# EAGLE board final (EAGLE 8.5.0), part 1 of 3
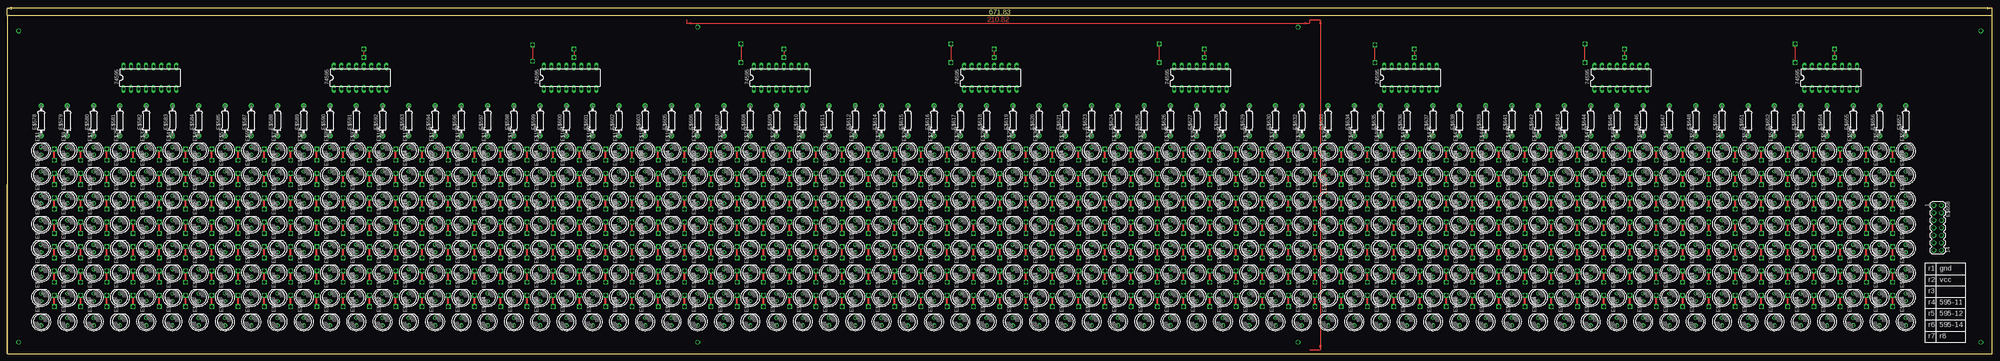
[diagram p0: board, top side]
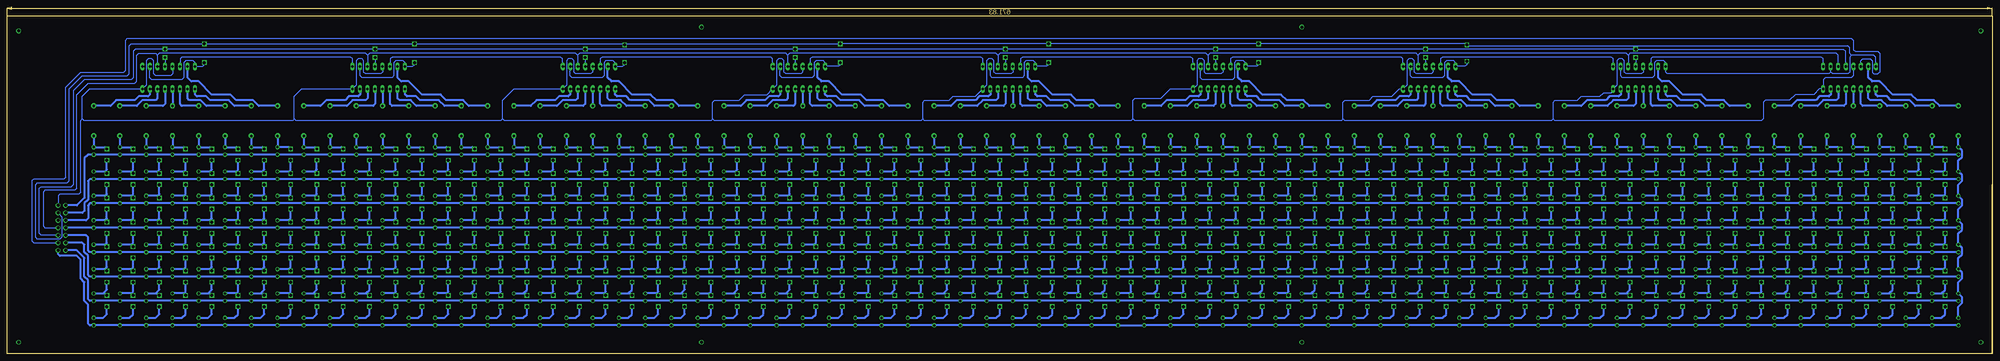
[diagram p1: board, bottom side, seen from below]

Size 671.83 x 114.3 mm. Coordinates in mm from the lower left corner, seen from the top.
Outline: 0,114.3 0,0 671.83,0 671.83,114.3 0,114.3
Copper layers (1*16): Top 0.035mm / dielectric 1.5mm / Bottom 0.035mm
Design rules "default": minimum track width 6mil, minimum drill 0.35mm, track to track 6mil, track to pad 6mil, pad to pad 6mil, via to via 6mil, smd to smd 6mil, copper to edge 40mil, drill to drill 6mil, minimum pad ring 10mil, minimum via ring 8mil, stop-mask expansion 4mil, vias tented up to drill 0mil, thermal gap 10mil

## Footprints (pad centres in the part's own frame; a part is rotated, then mirrored left to right if it is on the bottom)
LED5MM = drill 0.813 octagon: A -1.27,0; K 1.27,0
DIL16 = drill 0.813 long: !OE 3.81,1.27; !SRCLR 3.81,-6.35; A 3.81,6.35; B -3.81,8.89; C -3.81,6.35; D -3.81,3.81; E -3.81,1.27; F -3.81,-1.27; G -3.81,-3.81; GND -3.81,-8.89; H -3.81,-6.35; H' 3.81,-8.89; RCLK 3.81,-1.27; SER 3.81,3.81; SRCLK 3.81,-3.81; VCC 3.81,8.89
0207/10 = drill 0.813 pad 1.676 octagon: 1 -5.08,0; 2 5.08,0
MA07-2 = drill 1.016 octagon: 1 -7.62,-1.27; 2 -7.62,1.27; 3 -5.08,-1.27; 4 -5.08,1.27; 5 -2.54,-1.27; 6 -2.54,1.27; 7 0,-1.27; 8 0,1.27; 9 2.54,-1.27; 10 2.54,1.27; 11 5.08,-1.27; 12 5.08,1.27; 13 7.62,-1.27; 14 7.62,1.27

## Placement (x,y rotation side)
E$1  [LED5MM]  11.43,68.58 90 top
E$2  [LED5MM]  11.43,60.33 90 top
E$3  [LED5MM]  11.43,52.07 90 top
E$4  [LED5MM]  11.43,43.82 90 top
E$5  [LED5MM]  11.43,35.56 90 top
E$6  [LED5MM]  11.43,27.3 90 top
E$7  [LED5MM]  11.43,19.05 90 top
E$8  [LED5MM]  11.43,10.79 90 top
E$9  [LED5MM]  20.32,68.58 90 top
E$10  [LED5MM]  20.32,60.33 90 top
E$11  [LED5MM]  20.32,52.07 90 top
E$12  [LED5MM]  20.32,43.82 90 top
E$13  [LED5MM]  20.32,35.56 90 top
E$14  [LED5MM]  20.32,27.3 90 top
E$15  [LED5MM]  20.32,19.05 90 top
E$16  [LED5MM]  20.32,10.79 90 top
E$17  [LED5MM]  29.21,68.58 90 top
E$18  [LED5MM]  29.21,60.33 90 top
E$19  [LED5MM]  29.21,52.07 90 top
E$20  [LED5MM]  29.21,43.82 90 top
E$21  [LED5MM]  29.21,35.56 90 top
E$22  [LED5MM]  29.21,27.3 90 top
E$23  [LED5MM]  29.21,19.05 90 top
E$24  [LED5MM]  29.21,10.79 90 top
E$25  [LED5MM]  38.1,68.58 90 top
E$26  [LED5MM]  38.1,60.33 90 top
E$27  [LED5MM]  38.1,52.07 90 top
E$28  [LED5MM]  38.1,43.82 90 top
E$29  [LED5MM]  38.1,35.56 90 top
E$30  [LED5MM]  38.1,27.3 90 top
E$31  [LED5MM]  38.1,19.05 90 top
E$32  [LED5MM]  38.1,10.79 90 top
E$33  [LED5MM]  46.99,68.58 90 top
E$34  [LED5MM]  46.99,60.33 90 top
E$35  [LED5MM]  46.99,52.07 90 top
E$36  [LED5MM]  46.99,43.82 90 top
E$37  [LED5MM]  46.99,35.56 90 top
E$38  [LED5MM]  46.99,27.3 90 top
E$39  [LED5MM]  46.99,19.05 90 top
E$40  [LED5MM]  46.99,10.79 90 top
E$41  [LED5MM]  55.88,68.58 90 top
E$42  [LED5MM]  55.88,60.33 90 top
E$43  [LED5MM]  55.88,52.07 90 top
E$44  [LED5MM]  55.88,43.82 90 top
E$45  [LED5MM]  55.88,35.56 90 top
E$46  [LED5MM]  55.88,27.3 90 top
E$47  [LED5MM]  55.88,19.05 90 top
E$48  [LED5MM]  55.88,10.79 90 top
E$49  [LED5MM]  64.77,68.58 90 top
E$50  [LED5MM]  64.77,60.33 90 top
E$51  [LED5MM]  64.77,52.07 90 top
E$52  [LED5MM]  64.77,43.82 90 top
E$53  [LED5MM]  64.77,35.56 90 top
E$54  [LED5MM]  64.77,27.3 90 top
E$55  [LED5MM]  64.77,19.05 90 top
E$56  [LED5MM]  64.77,10.79 90 top
E$57  [LED5MM]  73.66,68.58 90 top
E$58  [LED5MM]  73.66,60.33 90 top
E$59  [LED5MM]  73.66,52.07 90 top
E$60  [LED5MM]  73.66,43.82 90 top
E$61  [LED5MM]  73.66,35.56 90 top
E$62  [LED5MM]  73.66,27.3 90 top
E$63  [LED5MM]  73.66,19.05 90 top
E$64  [LED5MM]  73.66,10.79 90 top
E$65  [LED5MM]  82.55,68.58 90 top
E$66  [LED5MM]  82.55,60.33 90 top
E$67  [LED5MM]  82.55,52.07 90 top
E$68  [LED5MM]  82.55,43.82 90 top
E$69  [LED5MM]  82.55,35.56 90 top
E$70  [LED5MM]  82.55,27.3 90 top
E$71  [LED5MM]  82.55,19.05 90 top
E$72  [LED5MM]  82.55,10.79 90 top
E$73  [LED5MM]  91.44,68.58 90 top
E$74  [LED5MM]  91.44,60.33 90 top
E$75  [LED5MM]  91.44,52.07 90 top
E$76  [LED5MM]  91.44,43.82 90 top
E$77  [LED5MM]  91.44,35.56 90 top
E$78  [LED5MM]  91.44,27.3 90 top
E$79  [LED5MM]  91.44,19.05 90 top
E$80  [LED5MM]  91.44,10.79 90 top
E$81  [LED5MM]  100.33,68.58 90 top
E$82  [LED5MM]  100.33,60.33 90 top
E$83  [LED5MM]  100.33,52.07 90 top
E$84  [LED5MM]  100.33,43.82 90 top
E$85  [LED5MM]  100.33,35.56 90 top
E$86  [LED5MM]  100.33,27.3 90 top
E$87  [LED5MM]  100.33,19.05 90 top
E$88  [LED5MM]  100.33,10.79 90 top
E$89  [LED5MM]  109.22,68.58 90 top
E$90  [LED5MM]  109.22,60.33 90 top
E$91  [LED5MM]  109.22,52.07 90 top
E$92  [LED5MM]  109.22,43.82 90 top
E$93  [LED5MM]  109.22,35.56 90 top
E$94  [LED5MM]  109.22,27.3 90 top
E$95  [LED5MM]  109.22,19.05 90 top
E$96  [LED5MM]  109.22,10.79 90 top
E$97  [LED5MM]  118.11,68.58 90 top
E$98  [LED5MM]  118.11,60.33 90 top
E$99  [LED5MM]  118.11,52.07 90 top
E$100  [LED5MM]  118.11,43.82 90 top
E$101  [LED5MM]  118.11,35.56 90 top
E$102  [LED5MM]  118.11,27.3 90 top
E$103  [LED5MM]  118.11,19.05 90 top
E$104  [LED5MM]  118.11,10.79 90 top
E$105  [LED5MM]  127,68.58 90 top
E$106  [LED5MM]  127,60.33 90 top
E$107  [LED5MM]  127,52.07 90 top
E$108  [LED5MM]  127,43.82 90 top
E$109  [LED5MM]  127,35.56 90 top
E$110  [LED5MM]  127,27.3 90 top
E$111  [LED5MM]  127,19.05 90 top
E$112  [LED5MM]  127,10.79 90 top
E$113  [LED5MM]  135.89,68.58 90 top
E$114  [LED5MM]  135.89,60.33 90 top
E$115  [LED5MM]  135.89,52.07 90 top
E$116  [LED5MM]  135.89,43.82 90 top
E$117  [LED5MM]  135.89,35.56 90 top
E$118  [LED5MM]  135.89,27.3 90 top
E$119  [LED5MM]  135.89,19.05 90 top
E$120  [LED5MM]  135.89,10.79 90 top
E$121  [LED5MM]  144.78,68.58 90 top
E$122  [LED5MM]  144.78,60.33 90 top
E$123  [LED5MM]  144.78,52.07 90 top
E$124  [LED5MM]  144.78,43.82 90 top
E$125  [LED5MM]  144.78,35.56 90 top
E$126  [LED5MM]  144.78,27.3 90 top
E$127  [LED5MM]  144.78,19.05 90 top
E$128  [LED5MM]  144.78,10.79 90 top
E$129  [LED5MM]  153.67,68.58 90 top
E$130  [LED5MM]  153.67,60.33 90 top
E$131  [LED5MM]  153.67,52.07 90 top
E$132  [LED5MM]  153.67,43.82 90 top
E$133  [LED5MM]  153.67,35.56 90 top
E$134  [LED5MM]  153.67,27.3 90 top
E$135  [LED5MM]  153.67,19.05 90 top
E$136  [LED5MM]  153.67,10.79 90 top
E$137  [LED5MM]  162.56,68.58 90 top
E$138  [LED5MM]  162.56,60.33 90 top
E$139  [LED5MM]  162.56,52.07 90 top
E$140  [LED5MM]  162.56,43.82 90 top
E$141  [LED5MM]  162.56,35.56 90 top
E$142  [LED5MM]  162.56,27.3 90 top
E$143  [LED5MM]  162.56,19.05 90 top
E$144  [LED5MM]  162.56,10.79 90 top
E$145  [LED5MM]  171.45,68.58 90 top
E$146  [LED5MM]  171.45,60.33 90 top
E$147  [LED5MM]  171.45,52.07 90 top
E$148  [LED5MM]  171.45,43.82 90 top
E$149  [LED5MM]  171.45,35.56 90 top
E$150  [LED5MM]  171.45,27.3 90 top
E$151  [LED5MM]  171.45,19.05 90 top
E$152  [LED5MM]  171.45,10.79 90 top
E$153  [LED5MM]  180.34,68.58 90 top
E$154  [LED5MM]  180.34,60.33 90 top
E$155  [LED5MM]  180.34,52.07 90 top
E$156  [LED5MM]  180.34,43.82 90 top
E$157  [LED5MM]  180.34,35.56 90 top
E$158  [LED5MM]  180.34,27.3 90 top
E$159  [LED5MM]  180.34,19.05 90 top
E$160  [LED5MM]  180.34,10.79 90 top
E$161  [LED5MM]  189.23,68.58 90 top
E$162  [LED5MM]  189.23,60.33 90 top
E$163  [LED5MM]  189.23,52.07 90 top
E$164  [LED5MM]  189.23,43.82 90 top
E$165  [LED5MM]  189.23,35.56 90 top
E$166  [LED5MM]  189.23,27.3 90 top
E$167  [LED5MM]  189.23,19.05 90 top
E$168  [LED5MM]  189.23,10.79 90 top
E$169  [LED5MM]  198.12,68.58 90 top
E$170  [LED5MM]  198.12,60.33 90 top
E$171  [LED5MM]  198.12,52.07 90 top
E$172  [LED5MM]  198.12,43.82 90 top
E$173  [LED5MM]  198.12,35.56 90 top
E$174  [LED5MM]  198.12,27.3 90 top
E$175  [LED5MM]  198.12,19.05 90 top
E$176  [LED5MM]  198.12,10.79 90 top
E$177  [LED5MM]  207.01,68.58 90 top
E$178  [LED5MM]  207.01,60.33 90 top
E$179  [LED5MM]  207.01,52.07 90 top
E$180  [LED5MM]  207.01,43.82 90 top
E$181  [LED5MM]  207.01,35.56 90 top
E$182  [LED5MM]  207.01,27.3 90 top
E$183  [LED5MM]  207.01,19.05 90 top
E$184  [LED5MM]  207.01,10.79 90 top
E$185  [LED5MM]  215.9,68.58 90 top
E$186  [LED5MM]  215.9,60.33 90 top
E$187  [LED5MM]  215.9,52.07 90 top
E$188  [LED5MM]  215.9,43.82 90 top
E$189  [LED5MM]  215.9,35.56 90 top
E$190  [LED5MM]  215.9,27.3 90 top
E$191  [LED5MM]  215.9,19.05 90 top
E$192  [LED5MM]  215.9,10.79 90 top
E$193  [LED5MM]  224.79,68.58 90 top
E$194  [LED5MM]  224.79,60.33 90 top
E$195  [LED5MM]  224.79,52.07 90 top
E$196  [LED5MM]  224.79,43.82 90 top
E$197  [LED5MM]  224.79,35.56 90 top
E$198  [LED5MM]  224.79,27.3 90 top
E$199  [LED5MM]  224.79,19.05 90 top
E$200  [LED5MM]  224.79,10.79 90 top
E$201  [LED5MM]  233.68,68.58 90 top
E$202  [LED5MM]  233.68,60.33 90 top
E$203  [LED5MM]  233.68,52.07 90 top
E$204  [LED5MM]  233.68,43.82 90 top
E$205  [LED5MM]  233.68,35.56 90 top
E$206  [LED5MM]  233.68,27.3 90 top
E$207  [LED5MM]  233.68,19.05 90 top
E$208  [LED5MM]  233.68,10.79 90 top
E$209  [LED5MM]  242.57,68.58 90 top
E$210  [LED5MM]  242.57,60.33 90 top
E$211  [LED5MM]  242.57,52.07 90 top
E$212  [LED5MM]  242.57,43.82 90 top
E$213  [LED5MM]  242.57,35.56 90 top
E$214  [LED5MM]  242.57,27.3 90 top
E$215  [LED5MM]  242.57,19.05 90 top
E$216  [LED5MM]  242.57,10.79 90 top
E$217  [LED5MM]  251.46,68.58 90 top
E$218  [LED5MM]  251.46,60.33 90 top
E$219  [LED5MM]  251.46,52.07 90 top
E$220  [LED5MM]  251.46,43.82 90 top
E$221  [LED5MM]  251.46,35.56 90 top
E$222  [LED5MM]  251.46,27.3 90 top
E$223  [LED5MM]  251.46,19.05 90 top
E$224  [LED5MM]  251.46,10.79 90 top
E$225  [LED5MM]  260.35,68.58 90 top
E$226  [LED5MM]  260.35,60.33 90 top
E$227  [LED5MM]  260.35,52.07 90 top
E$228  [LED5MM]  260.35,43.82 90 top
E$229  [LED5MM]  260.35,35.56 90 top
E$230  [LED5MM]  260.35,27.3 90 top
E$231  [LED5MM]  260.35,19.05 90 top
E$232  [LED5MM]  260.35,10.79 90 top
E$233  [LED5MM]  269.24,68.58 90 top
E$234  [LED5MM]  269.24,60.33 90 top
E$235  [LED5MM]  269.24,52.07 90 top
E$236  [LED5MM]  269.24,43.82 90 top
E$237  [LED5MM]  269.24,35.56 90 top
E$238  [LED5MM]  269.24,27.3 90 top
E$239  [LED5MM]  269.24,19.05 90 top
E$240  [LED5MM]  269.24,10.79 90 top
E$241  [LED5MM]  278.13,68.58 90 top
E$242  [LED5MM]  278.13,60.33 90 top
E$243  [LED5MM]  278.13,52.07 90 top
E$244  [LED5MM]  278.13,43.82 90 top
E$245  [LED5MM]  278.13,35.56 90 top
E$246  [LED5MM]  278.13,27.3 90 top
E$247  [LED5MM]  278.13,19.05 90 top
E$248  [LED5MM]  278.13,10.79 90 top
E$249  [LED5MM]  287.02,68.58 90 top
E$250  [LED5MM]  287.02,60.33 90 top
E$251  [LED5MM]  287.02,52.07 90 top
E$252  [LED5MM]  287.02,43.82 90 top
E$253  [LED5MM]  287.02,35.56 90 top
E$254  [LED5MM]  287.02,27.3 90 top
E$255  [LED5MM]  287.02,19.05 90 top
E$256  [LED5MM]  287.02,10.79 90 top
E$257  [LED5MM]  295.91,68.58 90 top
E$258  [LED5MM]  295.91,60.33 90 top
E$259  [LED5MM]  295.91,52.07 90 top
E$260  [LED5MM]  295.91,43.82 90 top
E$261  [LED5MM]  295.91,35.56 90 top
E$262  [LED5MM]  295.91,27.3 90 top
E$263  [LED5MM]  295.91,19.05 90 top
E$264  [LED5MM]  295.91,10.79 90 top
E$265  [LED5MM]  304.8,68.58 90 top
E$266  [LED5MM]  304.8,60.33 90 top
E$267  [LED5MM]  304.8,52.07 90 top
E$268  [LED5MM]  304.8,43.82 90 top
E$269  [LED5MM]  304.8,35.56 90 top
E$270  [LED5MM]  304.8,27.3 90 top
E$271  [LED5MM]  304.8,19.05 90 top
E$272  [LED5MM]  304.8,10.79 90 top
E$273  [LED5MM]  313.69,68.58 90 top
E$274  [LED5MM]  313.69,60.33 90 top
E$275  [LED5MM]  313.69,52.07 90 top
E$276  [LED5MM]  313.69,43.82 90 top
E$277  [LED5MM]  313.69,35.56 90 top
E$278  [LED5MM]  313.69,27.3 90 top
E$279  [LED5MM]  313.69,19.05 90 top
E$280  [LED5MM]  313.69,10.79 90 top
E$281  [LED5MM]  322.58,68.58 90 top
E$282  [LED5MM]  322.58,60.33 90 top
E$283  [LED5MM]  322.58,52.07 90 top
E$284  [LED5MM]  322.58,43.82 90 top
E$285  [LED5MM]  322.58,35.56 90 top
E$286  [LED5MM]  322.58,27.3 90 top
E$287  [LED5MM]  322.58,19.05 90 top
E$288  [LED5MM]  322.58,10.79 90 top
E$289  [LED5MM]  331.47,68.58 90 top
E$290  [LED5MM]  331.47,60.33 90 top
E$291  [LED5MM]  331.47,52.07 90 top
E$292  [LED5MM]  331.47,43.82 90 top
E$293  [LED5MM]  331.47,35.56 90 top
E$294  [LED5MM]  331.47,27.3 90 top
E$295  [LED5MM]  331.47,19.05 90 top
E$296  [LED5MM]  331.47,10.79 90 top
E$297  [LED5MM]  340.36,68.58 90 top
E$298  [LED5MM]  340.36,60.33 90 top
E$299  [LED5MM]  340.36,52.07 90 top
E$300  [LED5MM]  340.36,43.82 90 top
E$301  [LED5MM]  340.36,35.56 90 top
E$302  [LED5MM]  340.36,27.3 90 top
E$303  [LED5MM]  340.36,19.05 90 top
E$304  [LED5MM]  340.36,10.79 90 top
E$305  [LED5MM]  349.25,68.58 90 top
E$306  [LED5MM]  349.25,60.33 90 top
E$307  [LED5MM]  349.25,52.07 90 top
E$308  [LED5MM]  349.25,43.82 90 top
E$309  [LED5MM]  349.25,35.56 90 top
E$310  [LED5MM]  349.25,27.3 90 top
E$311  [LED5MM]  349.25,19.05 90 top
E$312  [LED5MM]  349.25,10.79 90 top
E$313  [LED5MM]  358.14,68.58 90 top
E$314  [LED5MM]  358.14,60.33 90 top
E$315  [LED5MM]  358.14,52.07 90 top
E$316  [LED5MM]  358.14,43.82 90 top
E$317  [LED5MM]  358.14,35.56 90 top
E$318  [LED5MM]  358.14,27.3 90 top
E$319  [LED5MM]  358.14,19.05 90 top
E$320  [LED5MM]  358.14,10.79 90 top
E$321  [LED5MM]  367.03,68.58 90 top
E$322  [LED5MM]  367.03,60.33 90 top
E$323  [LED5MM]  367.03,52.07 90 top
E$324  [LED5MM]  367.03,43.82 90 top
E$325  [LED5MM]  367.03,35.56 90 top
E$326  [LED5MM]  367.03,27.3 90 top
E$327  [LED5MM]  367.03,19.05 90 top
E$328  [LED5MM]  367.03,10.79 90 top
E$329  [LED5MM]  375.92,68.58 90 top
E$330  [LED5MM]  375.92,60.33 90 top
E$331  [LED5MM]  375.92,52.07 90 top
E$332  [LED5MM]  375.92,43.82 90 top
E$333  [LED5MM]  375.92,35.56 90 top
E$334  [LED5MM]  375.92,27.3 90 top
E$335  [LED5MM]  375.92,19.05 90 top
E$336  [LED5MM]  375.92,10.79 90 top
E$337  [LED5MM]  384.81,68.58 90 top
E$338  [LED5MM]  384.81,60.33 90 top
E$339  [LED5MM]  384.81,52.07 90 top
E$340  [LED5MM]  384.81,43.82 90 top
E$341  [LED5MM]  384.81,35.56 90 top
E$342  [LED5MM]  384.81,27.3 90 top
E$343  [LED5MM]  384.81,19.05 90 top
E$344  [LED5MM]  384.81,10.79 90 top
E$345  [LED5MM]  393.7,68.58 90 top
E$346  [LED5MM]  393.7,60.33 90 top
E$347  [LED5MM]  393.7,52.07 90 top
E$348  [LED5MM]  393.7,43.82 90 top
E$349  [LED5MM]  393.7,35.56 90 top
E$350  [LED5MM]  393.7,27.3 90 top
E$351  [LED5MM]  393.7,19.05 90 top
E$352  [LED5MM]  393.7,10.79 90 top
E$353  [LED5MM]  402.59,68.58 90 top
E$354  [LED5MM]  402.59,60.33 90 top
E$355  [LED5MM]  402.59,52.07 90 top
E$356  [LED5MM]  402.59,43.82 90 top
E$357  [LED5MM]  402.59,35.56 90 top
E$358  [LED5MM]  402.59,27.3 90 top
E$359  [LED5MM]  402.59,19.05 90 top
E$360  [LED5MM]  402.59,10.79 90 top
E$361  [LED5MM]  411.48,68.58 90 top
E$362  [LED5MM]  411.48,60.33 90 top
E$363  [LED5MM]  411.48,52.07 90 top
E$364  [LED5MM]  411.48,43.82 90 top
E$365  [LED5MM]  411.48,35.56 90 top
E$366  [LED5MM]  411.48,27.3 90 top
E$367  [LED5MM]  411.48,19.05 90 top
E$368  [LED5MM]  411.48,10.79 90 top
E$369  [LED5MM]  420.37,68.58 90 top
E$370  [LED5MM]  420.37,60.33 90 top
E$371  [LED5MM]  420.37,52.07 90 top
E$372  [LED5MM]  420.37,43.82 90 top
E$373  [LED5MM]  420.37,35.56 90 top
E$374  [LED5MM]  420.37,27.3 90 top
E$375  [LED5MM]  420.37,19.05 90 top
E$376  [LED5MM]  420.37,10.79 90 top
E$377  [LED5MM]  429.26,68.58 90 top
E$378  [LED5MM]  429.26,60.33 90 top
E$379  [LED5MM]  429.26,52.07 90 top
E$380  [LED5MM]  429.26,43.82 90 top
E$381  [LED5MM]  429.26,35.56 90 top
E$382  [LED5MM]  429.26,27.3 90 top
E$383  [LED5MM]  429.26,19.05 90 top
E$384  [LED5MM]  429.26,10.79 90 top
E$385  [LED5MM]  438.15,68.58 90 top
E$386  [LED5MM]  438.15,60.33 90 top
E$387  [LED5MM]  438.15,52.07 90 top
E$388  [LED5MM]  438.15,43.82 90 top
E$389  [LED5MM]  438.15,35.56 90 top
E$390  [LED5MM]  438.15,27.3 90 top
E$391  [LED5MM]  438.15,19.05 90 top
E$392  [LED5MM]  438.15,10.79 90 top
E$393  [LED5MM]  447.04,68.58 90 top
E$394  [LED5MM]  447.04,60.33 90 top
E$395  [LED5MM]  447.04,52.07 90 top
E$396  [LED5MM]  447.04,43.82 90 top
E$397  [LED5MM]  447.04,35.56 90 top
E$398  [LED5MM]  447.04,27.3 90 top
E$399  [LED5MM]  447.04,19.05 90 top
E$400  [LED5MM]  447.04,10.79 90 top
E$401  [LED5MM]  455.93,68.58 90 top
E$402  [LED5MM]  455.93,60.33 90 top
E$403  [LED5MM]  455.93,52.07 90 top
E$404  [LED5MM]  455.93,43.82 90 top
E$405  [LED5MM]  455.93,35.56 90 top
E$406  [LED5MM]  455.93,27.3 90 top
E$407  [LED5MM]  455.93,19.05 90 top
E$408  [LED5MM]  455.93,10.79 90 top
E$409  [LED5MM]  464.82,68.58 90 top
E$410  [LED5MM]  464.82,60.33 90 top
E$411  [LED5MM]  464.82,52.07 90 top
E$412  [LED5MM]  464.82,43.82 90 top
E$413  [LED5MM]  464.82,35.56 90 top
E$414  [LED5MM]  464.82,27.3 90 top
E$415  [LED5MM]  464.82,19.05 90 top
E$416  [LED5MM]  464.82,10.79 90 top
E$417  [LED5MM]  473.71,68.58 90 top
E$418  [LED5MM]  473.71,60.33 90 top
E$419  [LED5MM]  473.71,52.07 90 top
E$420  [LED5MM]  473.71,43.82 90 top
E$421  [LED5MM]  473.71,35.56 90 top
E$422  [LED5MM]  473.71,27.3 90 top
E$423  [LED5MM]  473.71,19.05 90 top
E$424  [LED5MM]  473.71,10.79 90 top
E$425  [LED5MM]  482.6,68.58 90 top
E$426  [LED5MM]  482.6,60.33 90 top
E$427  [LED5MM]  482.6,52.07 90 top
E$428  [LED5MM]  482.6,43.82 90 top
E$429  [LED5MM]  482.6,35.56 90 top
E$430  [LED5MM]  482.6,27.3 90 top
E$431  [LED5MM]  482.6,19.05 90 top
E$432  [LED5MM]  482.6,10.79 90 top
E$433  [LED5MM]  491.49,68.58 90 top
E$434  [LED5MM]  491.49,60.33 90 top
E$435  [LED5MM]  491.49,52.07 90 top
E$436  [LED5MM]  491.49,43.82 90 top
E$437  [LED5MM]  491.49,35.56 90 top
E$438  [LED5MM]  491.49,27.3 90 top
E$439  [LED5MM]  491.49,19.05 90 top
E$440  [LED5MM]  491.49,10.79 90 top
E$441  [LED5MM]  500.38,68.58 90 top
E$442  [LED5MM]  500.38,60.33 90 top
E$443  [LED5MM]  500.38,52.07 90 top
E$444  [LED5MM]  500.38,43.82 90 top
E$445  [LED5MM]  500.38,35.56 90 top
E$446  [LED5MM]  500.38,27.3 90 top
E$447  [LED5MM]  500.38,19.05 90 top
E$448  [LED5MM]  500.38,10.79 90 top
E$449  [LED5MM]  509.27,68.58 90 top
E$450  [LED5MM]  509.27,60.33 90 top
E$451  [LED5MM]  509.27,52.07 90 top
E$452  [LED5MM]  509.27,43.82 90 top
E$453  [LED5MM]  509.27,35.56 90 top
E$454  [LED5MM]  509.27,27.3 90 top
E$455  [LED5MM]  509.27,19.05 90 top
E$456  [LED5MM]  509.27,10.79 90 top
E$457  [LED5MM]  518.16,68.58 90 top
E$458  [LED5MM]  518.16,60.33 90 top
E$459  [LED5MM]  518.16,52.07 90 top
E$460  [LED5MM]  518.16,43.82 90 top
E$461  [LED5MM]  518.16,35.56 90 top
E$462  [LED5MM]  518.16,27.3 90 top
E$463  [LED5MM]  518.16,19.05 90 top
E$464  [LED5MM]  518.16,10.79 90 top
E$465  [LED5MM]  527.05,68.58 90 top
E$466  [LED5MM]  527.05,60.33 90 top
E$467  [LED5MM]  527.05,52.07 90 top
E$468  [LED5MM]  527.05,43.82 90 top
E$469  [LED5MM]  527.05,35.56 90 top
E$470  [LED5MM]  527.05,27.3 90 top
E$471  [LED5MM]  527.05,19.05 90 top
E$472  [LED5MM]  527.05,10.79 90 top
E$473  [LED5MM]  535.94,68.58 90 top
E$474  [LED5MM]  535.94,60.33 90 top
E$475  [LED5MM]  535.94,52.07 90 top
E$476  [LED5MM]  535.94,43.82 90 top
E$477  [LED5MM]  535.94,35.56 90 top
E$478  [LED5MM]  535.94,27.3 90 top
E$479  [LED5MM]  535.94,19.05 90 top
E$480  [LED5MM]  535.94,10.79 90 top
E$481  [LED5MM]  544.83,68.58 90 top
E$482  [LED5MM]  544.83,60.33 90 top
E$483  [LED5MM]  544.83,52.07 90 top
E$484  [LED5MM]  544.83,43.82 90 top
E$485  [LED5MM]  544.83,35.56 90 top
E$486  [LED5MM]  544.83,27.3 90 top
E$487  [LED5MM]  544.83,19.05 90 top
E$488  [LED5MM]  544.83,10.79 90 top
E$489  [LED5MM]  553.72,68.58 90 top
E$490  [LED5MM]  553.72,60.33 90 top
E$491  [LED5MM]  553.72,52.07 90 top
E$492  [LED5MM]  553.72,43.82 90 top
E$493  [LED5MM]  553.72,35.56 90 top
E$494  [LED5MM]  553.72,27.3 90 top
E$495  [LED5MM]  553.72,19.05 90 top
E$496  [LED5MM]  553.72,10.79 90 top
E$497  [LED5MM]  562.61,68.58 90 top
E$498  [LED5MM]  562.61,60.33 90 top
E$499  [LED5MM]  562.61,52.07 90 top
E$500  [LED5MM]  562.61,43.82 90 top
E$501  [LED5MM]  562.61,35.56 90 top
E$502  [LED5MM]  562.61,27.3 90 top
E$503  [LED5MM]  562.61,19.05 90 top
E$504  [LED5MM]  562.61,10.79 90 top
E$505  [LED5MM]  571.5,68.58 90 top
E$506  [LED5MM]  571.5,60.33 90 top
E$507  [LED5MM]  571.5,52.07 90 top
E$508  [LED5MM]  571.5,43.82 90 top
E$509  [LED5MM]  571.5,35.56 90 top
E$510  [LED5MM]  571.5,27.3 90 top
E$511  [LED5MM]  571.5,19.05 90 top
E$512  [LED5MM]  571.5,10.79 90 top
E$513  [LED5MM]  580.39,68.58 90 top
E$514  [LED5MM]  580.39,60.33 90 top
E$515  [LED5MM]  580.39,52.07 90 top
E$516  [LED5MM]  580.39,43.82 90 top
E$517  [LED5MM]  580.39,35.56 90 top
E$518  [LED5MM]  580.39,27.3 90 top
E$519  [LED5MM]  580.39,19.05 90 top
E$520  [LED5MM]  580.39,10.79 90 top
E$521  [LED5MM]  589.28,68.58 90 top
E$522  [LED5MM]  589.28,60.33 90 top
E$523  [LED5MM]  589.28,52.07 90 top
E$524  [LED5MM]  589.28,43.82 90 top
E$525  [LED5MM]  589.28,35.56 90 top
E$526  [LED5MM]  589.28,27.3 90 top
E$527  [LED5MM]  589.28,19.05 90 top
E$528  [LED5MM]  589.28,10.79 90 top
E$529  [LED5MM]  598.17,68.58 90 top
E$530  [LED5MM]  598.17,60.33 90 top
E$531  [LED5MM]  598.17,52.07 90 top
E$532  [LED5MM]  598.17,43.82 90 top
E$533  [LED5MM]  598.17,35.56 90 top
E$534  [LED5MM]  598.17,27.3 90 top
E$535  [LED5MM]  598.17,19.05 90 top
E$536  [LED5MM]  598.17,10.79 90 top
E$537  [LED5MM]  607.06,68.58 90 top
E$538  [LED5MM]  607.06,60.33 90 top
E$539  [LED5MM]  607.06,52.07 90 top
E$540  [LED5MM]  607.06,43.82 90 top
E$541  [LED5MM]  607.06,35.56 90 top
E$542  [LED5MM]  607.06,27.3 90 top
E$543  [LED5MM]  607.06,19.05 90 top
E$544  [LED5MM]  607.06,10.79 90 top
E$545  [LED5MM]  615.95,68.58 90 top
E$546  [LED5MM]  615.95,60.33 90 top
E$547  [LED5MM]  615.95,52.07 90 top
E$548  [LED5MM]  615.95,43.82 90 top
E$549  [LED5MM]  615.95,35.56 90 top
E$550  [LED5MM]  615.95,27.3 90 top
E$551  [LED5MM]  615.95,19.05 90 top
E$552  [LED5MM]  615.95,10.79 90 top
E$553  [LED5MM]  624.84,68.58 90 top
E$554  [LED5MM]  624.84,60.33 90 top
E$555  [LED5MM]  624.84,52.07 90 top
E$556  [LED5MM]  624.84,43.82 90 top
E$557  [LED5MM]  624.84,35.56 90 top
E$558  [LED5MM]  624.84,27.3 90 top
E$559  [LED5MM]  624.84,19.05 90 top
E$560  [LED5MM]  624.84,10.79 90 top
E$561  [LED5MM]  633.73,68.58 90 top
E$562  [LED5MM]  633.73,60.33 90 top
E$563  [LED5MM]  633.73,52.07 90 top
E$564  [LED5MM]  633.73,43.82 90 top
E$565  [LED5MM]  633.73,35.56 90 top
E$566  [LED5MM]  633.73,27.3 90 top
E$567  [LED5MM]  633.73,19.05 90 top
E$568  [LED5MM]  633.73,10.79 90 top
E$569  [LED5MM]  642.62,68.58 90 top
E$570  [LED5MM]  642.62,60.33 90 top
E$571  [LED5MM]  642.62,52.07 90 top
E$572  [LED5MM]  642.62,43.82 90 top
E$573  [LED5MM]  642.62,35.56 90 top
E$574  [LED5MM]  642.62,27.3 90 top
E$575  [LED5MM]  642.62,19.05 90 top
E$576  [LED5MM]  642.62,10.79 90 top
E$577  [DIL16]  48.26,93.34 90 top
E$578  [0207/10]  11.43,78.74 90 top
E$579  [0207/10]  20.32,78.74 90 top
E$580  [0207/10]  29.21,78.74 90 top
E$581  [0207/10]  38.1,78.74 90 top
E$582  [0207/10]  46.99,78.74 90 top
E$583  [0207/10]  55.88,78.74 90 top
E$584  [0207/10]  64.77,78.74 90 top
E$585  [0207/10]  73.66,78.74 90 top
E$586  [DIL16]  119.38,93.34 90 top
E$587  [0207/10]  82.55,78.74 90 top
E$588  [0207/10]  91.44,78.74 90 top
E$589  [0207/10]  100.33,78.74 90 top
E$590  [0207/10]  109.22,78.74 90 top
E$591  [0207/10]  118.11,78.74 90 top
E$592  [0207/10]  127,78.74 90 top
E$593  [0207/10]  135.89,78.74 90 top
E$594  [0207/10]  144.78,78.74 90 top
E$595  [DIL16]  190.5,93.34 90 top
E$596  [0207/10]  153.67,78.74 90 top
E$597  [0207/10]  162.56,78.74 90 top
E$598  [0207/10]  171.45,78.74 90 top
E$599  [0207/10]  180.34,78.74 90 top
E$600  [0207/10]  189.23,78.74 90 top
E$601  [0207/10]  198.12,78.74 90 top
E$602  [0207/10]  207.01,78.74 90 top
E$603  [0207/10]  215.9,78.74 90 top
E$604  [DIL16]  261.62,93.34 90 top
E$605  [0207/10]  224.79,78.74 90 top
E$606  [0207/10]  233.68,78.74 90 top
E$607  [0207/10]  242.57,78.74 90 top
E$608  [0207/10]  251.46,78.74 90 top
E$609  [0207/10]  260.35,78.74 90 top
E$610  [0207/10]  269.24,78.74 90 top
E$611  [0207/10]  278.13,78.74 90 top
E$612  [0207/10]  287.02,78.74 90 top
E$613  [DIL16]  332.74,93.34 90 top
E$614  [0207/10]  295.91,78.74 90 top
E$615  [0207/10]  304.8,78.74 90 top
E$616  [0207/10]  313.69,78.74 90 top
E$617  [0207/10]  322.58,78.74 90 top
E$618  [0207/10]  331.47,78.74 90 top
E$619  [0207/10]  340.36,78.74 90 top
E$620  [0207/10]  349.25,78.74 90 top
E$621  [0207/10]  358.14,78.74 90 top
E$622  [DIL16]  403.86,93.34 90 top
E$623  [0207/10]  367.03,78.74 90 top
E$624  [0207/10]  375.92,78.74 90 top
E$625  [0207/10]  384.81,78.74 90 top
E$626  [0207/10]  393.7,78.74 90 top
E$627  [0207/10]  402.59,78.74 90 top
E$628  [0207/10]  411.48,78.74 90 top
E$629  [0207/10]  420.37,78.74 90 top
E$630  [0207/10]  429.26,78.74 90 top
E$631  [DIL16]  474.98,93.34 90 top
E$632  [0207/10]  438.15,78.74 90 top
E$633  [0207/10]  447.04,78.74 90 top
E$634  [0207/10]  455.93,78.74 90 top
E$635  [0207/10]  464.82,78.74 90 top
E$636  [0207/10]  473.71,78.74 90 top
E$637  [0207/10]  482.6,78.74 90 top
E$638  [0207/10]  491.49,78.74 90 top
E$639  [0207/10]  500.38,78.74 90 top
E$640  [DIL16]  546.1,93.34 90 top
E$641  [0207/10]  509.27,78.74 90 top
E$642  [0207/10]  518.16,78.74 90 top
E$643  [0207/10]  527.05,78.74 90 top
E$644  [0207/10]  535.94,78.74 90 top
E$645  [0207/10]  544.83,78.74 90 top
E$646  [0207/10]  553.72,78.74 90 top
E$647  [0207/10]  562.61,78.74 90 top
E$648  [0207/10]  571.5,78.74 90 top
E$649  [DIL16]  617.22,93.34 90 top
E$650  [0207/10]  580.39,78.74 90 top
E$651  [0207/10]  589.28,78.74 90 top
E$652  [0207/10]  598.17,78.74 90 top
E$653  [0207/10]  607.06,78.74 90 top
E$654  [0207/10]  615.95,78.74 90 top
E$655  [0207/10]  624.84,78.74 90 top
E$656  [0207/10]  633.73,78.74 90 top
E$657  [0207/10]  642.62,78.74 90 top
E$658  [MA07-2]  653.41,42.55 270 top

## Library data of the parts
E$1-E$576 = led
E$577 E$586 E$595 E$604 E$613 E$622 E$631 E$640 E$649 = 74595
E$578-E$585 E$587-E$594 E$596-E$603 E$605-E$612 E$614-E$621 E$623-E$630 E$632-E$639 E$641-E$648 E$650-E$657 = adafruit
E$658 = con-lstb

## Nets
595-11: E$577.SRCLK E$586.SRCLK E$595.SRCLK E$604.SRCLK E$613.SRCLK E$622.SRCLK E$631.SRCLK E$640.SRCLK E$649.SRCLK E$658.8
595-12: E$577.RCLK E$586.RCLK E$595.RCLK E$604.RCLK E$613.RCLK E$622.RCLK E$631.RCLK E$640.RCLK E$649.RCLK E$658.10
595-(14)-SERIALPIN: E$577.SER E$658.12
GND: E$577.!OE E$577.GND E$586.!OE E$586.GND E$595.!OE E$595.GND E$604.!OE E$604.GND E$613.!OE E$613.GND E$622.!OE E$622.GND E$631.!OE E$631.GND E$640.!OE E$640.GND E$649.!OE E$649.GND E$658.2
ROW1: E$1.A E$9.A E$17.A E$25.A E$33.A E$41.A E$49.A E$57.A E$65.A E$73.A E$81.A E$89.A E$97.A E$105.A E$113.A E$121.A E$129.A E$137.A E$145.A E$153.A E$161.A E$169.A E$177.A E$185.A E$193.A E$201.A E$209.A E$217.A E$225.A E$233.A E$241.A E$249.A E$257.A E$265.A E$273.A E$281.A E$289.A E$297.A E$305.A E$313.A E$321.A E$329.A E$337.A E$345.A E$353.A E$361.A E$369.A E$377.A E$385.A E$393.A E$401.A E$409.A E$417.A E$425.A E$433.A E$441.A E$449.A E$457.A E$465.A E$473.A E$481.A E$489.A E$497.A E$505.A E$513.A E$521.A E$529.A E$537.A E$545.A E$553.A E$561.A E$569.A E$658.1
ROW2: E$2.A E$10.A E$18.A E$26.A E$34.A E$42.A E$50.A E$58.A E$66.A E$74.A E$82.A E$90.A E$98.A E$106.A E$114.A E$122.A E$130.A E$138.A E$146.A E$154.A E$162.A E$170.A E$178.A E$186.A E$194.A E$202.A E$210.A E$218.A E$226.A E$234.A E$242.A E$250.A E$258.A E$266.A E$274.A E$282.A E$290.A E$298.A E$306.A E$314.A E$322.A E$330.A E$338.A E$346.A E$354.A E$362.A E$370.A E$378.A E$386.A E$394.A E$402.A E$410.A E$418.A E$426.A E$434.A E$442.A E$450.A E$458.A E$466.A E$474.A E$482.A E$490.A E$498.A E$506.A E$514.A E$522.A E$530.A E$538.A E$546.A E$554.A E$562.A E$570.A E$658.3
ROW3: E$3.A E$11.A E$19.A E$27.A E$35.A E$43.A E$51.A E$59.A E$67.A E$75.A E$83.A E$91.A E$99.A E$107.A E$115.A E$123.A E$131.A E$139.A E$147.A E$155.A E$163.A E$171.A E$179.A E$187.A E$195.A E$203.A E$211.A E$219.A E$227.A E$235.A E$243.A E$251.A E$259.A E$267.A E$275.A E$283.A E$291.A E$299.A E$307.A E$315.A E$323.A E$331.A E$339.A E$347.A E$355.A E$363.A E$371.A E$379.A E$387.A E$395.A E$403.A E$411.A E$419.A E$427.A E$435.A E$443.A E$451.A E$459.A E$467.A E$475.A E$483.A E$491.A E$499.A E$507.A E$515.A E$523.A E$531.A E$539.A E$547.A E$555.A E$563.A E$571.A E$658.5
ROW4: E$4.A E$12.A E$20.A E$28.A E$36.A E$44.A E$52.A E$60.A E$68.A E$76.A E$84.A E$92.A E$100.A E$108.A E$116.A E$124.A E$132.A E$140.A E$148.A E$156.A E$164.A E$172.A E$180.A E$188.A E$196.A E$204.A E$212.A E$220.A E$228.A E$236.A E$244.A E$252.A E$260.A E$268.A E$276.A E$284.A E$292.A E$300.A E$308.A E$316.A E$324.A E$332.A E$340.A E$348.A E$356.A E$364.A E$372.A E$380.A E$388.A E$396.A E$404.A E$412.A E$420.A E$428.A E$436.A E$444.A E$452.A E$460.A E$468.A E$476.A E$484.A E$492.A E$500.A E$508.A E$516.A E$524.A E$532.A E$540.A E$548.A E$556.A E$564.A E$572.A E$658.7
ROW5: E$5.A E$13.A E$21.A E$29.A E$37.A E$45.A E$53.A E$61.A E$69.A E$77.A E$85.A E$93.A E$101.A E$109.A E$117.A E$125.A E$133.A E$141.A E$149.A E$157.A E$165.A E$173.A E$181.A E$189.A E$197.A E$205.A E$213.A E$221.A E$229.A E$237.A E$245.A E$253.A E$261.A E$269.A E$277.A E$285.A E$293.A E$301.A E$309.A E$317.A E$325.A E$333.A E$341.A E$349.A E$357.A E$365.A E$373.A E$381.A E$389.A E$397.A E$405.A E$413.A E$421.A E$429.A E$437.A E$445.A E$453.A E$461.A E$469.A E$477.A E$485.A E$493.A E$501.A E$509.A E$517.A E$525.A E$533.A E$541.A E$549.A E$557.A E$565.A E$573.A E$658.9
ROW6: E$6.A E$14.A E$22.A E$30.A E$38.A E$46.A E$54.A E$62.A E$70.A E$78.A E$86.A E$94.A E$102.A E$110.A E$118.A E$126.A E$134.A E$142.A E$150.A E$158.A E$166.A E$174.A E$182.A E$190.A E$198.A E$206.A E$214.A E$222.A E$230.A E$238.A E$246.A E$254.A E$262.A E$270.A E$278.A E$286.A E$294.A E$302.A E$310.A E$318.A E$326.A E$334.A E$342.A E$350.A E$358.A E$366.A E$374.A E$382.A E$390.A E$398.A E$406.A E$414.A E$422.A E$430.A E$438.A E$446.A E$454.A E$462.A E$470.A E$478.A E$486.A E$494.A E$502.A E$510.A E$518.A E$526.A E$534.A E$542.A E$550.A E$558.A E$566.A E$574.A E$658.11
ROW7: E$7.A E$15.A E$23.A E$31.A E$39.A E$47.A E$55.A E$63.A E$71.A E$79.A E$87.A E$95.A E$103.A E$111.A E$119.A E$127.A E$135.A E$143.A E$151.A E$159.A E$167.A E$175.A E$183.A E$191.A E$199.A E$207.A E$215.A E$223.A E$231.A E$239.A E$247.A E$255.A E$263.A E$271.A E$279.A E$287.A E$295.A E$303.A E$311.A E$319.A E$327.A E$335.A E$343.A E$351.A E$359.A E$367.A E$375.A E$383.A E$391.A E$399.A E$407.A E$415.A E$423.A E$431.A E$439.A E$447.A E$455.A E$463.A E$471.A E$479.A E$487.A E$495.A E$503.A E$511.A E$519.A E$527.A E$535.A E$543.A E$551.A E$559.A E$567.A E$575.A E$658.13
ROW8: E$8.A E$16.A E$24.A E$32.A E$40.A E$48.A E$56.A E$64.A E$72.A E$80.A E$88.A E$96.A E$104.A E$112.A E$120.A E$128.A E$136.A E$144.A E$152.A E$160.A E$168.A E$176.A E$184.A E$192.A E$200.A E$208.A E$216.A E$224.A E$232.A E$240.A E$248.A E$256.A E$264.A E$272.A E$280.A E$288.A E$296.A E$304.A E$312.A E$320.A E$328.A E$336.A E$344.A E$352.A E$360.A E$368.A E$376.A E$384.A E$392.A E$400.A E$408.A E$416.A E$424.A E$432.A E$440.A E$448.A E$456.A E$464.A E$472.A E$480.A E$488.A E$496.A E$504.A E$512.A E$520.A E$528.A E$536.A E$544.A E$552.A E$560.A E$568.A E$576.A E$658.14
S$1: E$9.K E$10.K E$11.K E$12.K E$13.K E$14.K E$15.K E$16.K E$579.1
S$10: E$17.K E$18.K E$19.K E$20.K E$21.K E$22.K E$23.K E$24.K E$580.1
S$11: E$1.K E$2.K E$3.K E$4.K E$5.K E$6.K E$7.K E$8.K E$578.1
S$12: E$577.A E$578.2
S$13: E$577.B E$579.2
S$14: E$577.C E$580.2
S$15: E$577.D E$581.2
S$16: E$577.E E$582.2
S$17: E$577.F E$583.2
S$18: E$577.G E$584.2
S$19: E$25.K E$26.K E$27.K E$28.K E$29.K E$30.K E$31.K E$32.K E$581.1
S$20: E$41.K E$42.K E$43.K E$44.K E$45.K E$46.K E$47.K E$48.K E$583.1
S$21: E$57.K E$58.K E$59.K E$60.K E$61.K E$62.K E$63.K E$64.K E$585.1
S$22: E$49.K E$50.K E$51.K E$52.K E$53.K E$54.K E$55.K E$56.K E$584.1
S$23: E$33.K E$34.K E$35.K E$36.K E$37.K E$38.K E$39.K E$40.K E$582.1
S$24: E$73.K E$74.K E$75.K E$76.K E$77.K E$78.K E$79.K E$80.K E$588.1
S$25: E$89.K E$90.K E$91.K E$92.K E$93.K E$94.K E$95.K E$96.K E$590.1
S$26: E$81.K E$82.K E$83.K E$84.K E$85.K E$86.K E$87.K E$88.K E$589.1
S$27: E$105.K E$106.K E$107.K E$108.K E$109.K E$110.K E$111.K E$112.K E$592.1
S$28: E$121.K E$122.K E$123.K E$124.K E$125.K E$126.K E$127.K E$128.K E$594.1
S$29: E$113.K E$114.K E$115.K E$116.K E$117.K E$118.K E$119.K E$120.K E$593.1
S$30: E$97.K E$98.K E$99.K E$100.K E$101.K E$102.K E$103.K E$104.K E$591.1
S$31: E$65.K E$66.K E$67.K E$68.K E$69.K E$70.K E$71.K E$72.K E$587.1
S$32: E$137.K E$138.K E$139.K E$140.K E$141.K E$142.K E$143.K E$144.K E$597.1
S$33: E$153.K E$154.K E$155.K E$156.K E$157.K E$158.K E$159.K E$160.K E$599.1
S$34: E$145.K E$146.K E$147.K E$148.K E$149.K E$150.K E$151.K E$152.K E$598.1
S$35: E$169.K E$170.K E$171.K E$172.K E$173.K E$174.K E$175.K E$176.K E$601.1
S$36: E$185.K E$186.K E$187.K E$188.K E$189.K E$190.K E$191.K E$192.K E$603.1
S$37: E$177.K E$178.K E$179.K E$180.K E$181.K E$182.K E$183.K E$184.K E$602.1
S$38: E$161.K E$162.K E$163.K E$164.K E$165.K E$166.K E$167.K E$168.K E$600.1
S$39: E$201.K E$202.K E$203.K E$204.K E$205.K E$206.K E$207.K E$208.K E$606.1
S$40: E$217.K E$218.K E$219.K E$220.K E$221.K E$222.K E$223.K E$224.K E$608.1
S$41: E$209.K E$210.K E$211.K E$212.K E$213.K E$214.K E$215.K E$216.K E$607.1
S$42: E$233.K E$234.K E$235.K E$236.K E$237.K E$238.K E$239.K E$240.K E$610.1
S$43: E$249.K E$250.K E$251.K E$252.K E$253.K E$254.K E$255.K E$256.K E$612.1
S$44: E$241.K E$242.K E$243.K E$244.K E$245.K E$246.K E$247.K E$248.K E$611.1
S$45: E$225.K E$226.K E$227.K E$228.K E$229.K E$230.K E$231.K E$232.K E$609.1
S$46: E$193.K E$194.K E$195.K E$196.K E$197.K E$198.K E$199.K E$200.K E$605.1
S$47: E$129.K E$130.K E$131.K E$132.K E$133.K E$134.K E$135.K E$136.K E$596.1
S$48: E$265.K E$266.K E$267.K E$268.K E$269.K E$270.K E$271.K E$272.K E$615.1
S$49: E$281.K E$282.K E$283.K E$284.K E$285.K E$286.K E$287.K E$288.K E$617.1
S$50: E$273.K E$274.K E$275.K E$276.K E$277.K E$278.K E$279.K E$280.K E$616.1
S$51: E$297.K E$298.K E$299.K E$300.K E$301.K E$302.K E$303.K E$304.K E$619.1
S$52: E$313.K E$314.K E$315.K E$316.K E$317.K E$318.K E$319.K E$320.K E$621.1
S$53: E$305.K E$306.K E$307.K E$308.K E$309.K E$310.K E$311.K E$312.K E$620.1
S$54: E$289.K E$290.K E$291.K E$292.K E$293.K E$294.K E$295.K E$296.K E$618.1
S$55: E$329.K E$330.K E$331.K E$332.K E$333.K E$334.K E$335.K E$336.K E$624.1
S$56: E$345.K E$346.K E$347.K E$348.K E$349.K E$350.K E$351.K E$352.K E$626.1
S$57: E$337.K E$338.K E$339.K E$340.K E$341.K E$342.K E$343.K E$344.K E$625.1
S$58: E$361.K E$362.K E$363.K E$364.K E$365.K E$366.K E$367.K E$368.K E$628.1
S$59: E$377.K E$378.K E$379.K E$380.K E$381.K E$382.K E$383.K E$384.K E$630.1
S$60: E$369.K E$370.K E$371.K E$372.K E$373.K E$374.K E$375.K E$376.K E$629.1
S$61: E$353.K E$354.K E$355.K E$356.K E$357.K E$358.K E$359.K E$360.K E$627.1
S$62: E$321.K E$322.K E$323.K E$324.K E$325.K E$326.K E$327.K E$328.K E$623.1
S$63: E$393.K E$394.K E$395.K E$396.K E$397.K E$398.K E$399.K E$400.K E$633.1
S$64: E$409.K E$410.K E$411.K E$412.K E$413.K E$414.K E$415.K E$416.K E$635.1
S$65: E$401.K E$402.K E$403.K E$404.K E$405.K E$406.K E$407.K E$408.K E$634.1
S$66: E$425.K E$426.K E$427.K E$428.K E$429.K E$430.K E$431.K E$432.K E$637.1
S$67: E$441.K E$442.K E$443.K E$444.K E$445.K E$446.K E$447.K E$448.K E$639.1
S$68: E$433.K E$434.K E$435.K E$436.K E$437.K E$438.K E$439.K E$440.K E$638.1
S$69: E$417.K E$418.K E$419.K E$420.K E$421.K E$422.K E$423.K E$424.K E$636.1
S$70: E$457.K E$458.K E$459.K E$460.K E$461.K E$462.K E$463.K E$464.K E$642.1
S$71: E$473.K E$474.K E$475.K E$476.K E$477.K E$478.K E$479.K E$480.K E$644.1
S$72: E$465.K E$466.K E$467.K E$468.K E$469.K E$470.K E$471.K E$472.K E$643.1
S$73: E$489.K E$490.K E$491.K E$492.K E$493.K E$494.K E$495.K E$496.K E$646.1
S$74: E$505.K E$506.K E$507.K E$508.K E$509.K E$510.K E$511.K E$512.K E$648.1
S$75: E$497.K E$498.K E$499.K E$500.K E$501.K E$502.K E$503.K E$504.K E$647.1
S$76: E$481.K E$482.K E$483.K E$484.K E$485.K E$486.K E$487.K E$488.K E$645.1
S$77: E$449.K E$450.K E$451.K E$452.K E$453.K E$454.K E$455.K E$456.K E$641.1
S$78: E$385.K E$386.K E$387.K E$388.K E$389.K E$390.K E$391.K E$392.K E$632.1
S$79: E$257.K E$258.K E$259.K E$260.K E$261.K E$262.K E$263.K E$264.K E$614.1
S$80: E$521.K E$522.K E$523.K E$524.K E$525.K E$526.K E$527.K E$528.K E$651.1
S$81: E$537.K E$538.K E$539.K E$540.K E$541.K E$542.K E$543.K E$544.K E$653.1
S$82: E$529.K E$530.K E$531.K E$532.K E$533.K E$534.K E$535.K E$536.K E$652.1
S$83: E$553.K E$554.K E$555.K E$556.K E$557.K E$558.K E$559.K E$560.K E$655.1
S$84: E$569.K E$570.K E$571.K E$572.K E$573.K E$574.K E$575.K E$576.K E$657.1
S$85: E$561.K E$562.K E$563.K E$564.K E$565.K E$566.K E$567.K E$568.K E$656.1
S$86: E$545.K E$546.K E$547.K E$548.K E$549.K E$550.K E$551.K E$552.K E$654.1
S$87: E$513.K E$514.K E$515.K E$516.K E$517.K E$518.K E$519.K E$520.K E$650.1
S$88: E$577.H E$585.2
S$89: E$586.A E$587.2
S$90: E$586.B E$588.2
S$91: E$586.C E$589.2
S$92: E$586.D E$590.2
S$93: E$586.E E$591.2
S$94: E$586.F E$592.2
S$95: E$586.G E$593.2
S$96: E$586.H E$594.2
S$97: E$595.A E$596.2
S$98: E$595.B E$597.2
S$99: E$595.C E$598.2
S$100: E$595.D E$599.2
S$101: E$595.E E$600.2
S$102: E$595.F E$601.2
S$103: E$595.G E$602.2
S$104: E$595.H E$603.2
S$105: E$604.A E$605.2
S$106: E$604.B E$606.2
S$107: E$604.C E$607.2
S$108: E$604.D E$608.2
S$109: E$604.E E$609.2
S$110: E$604.F E$610.2
S$111: E$604.G E$611.2
S$112: E$604.H E$612.2
S$113: E$613.A E$614.2
S$114: E$613.B E$615.2
S$115: E$613.C E$616.2
S$116: E$613.D E$617.2
S$117: E$613.E E$618.2
S$118: E$613.F E$619.2
S$119: E$613.G E$620.2
S$120: E$613.H E$621.2
S$121: E$622.A E$623.2
S$122: E$622.B E$624.2
S$123: E$622.C E$625.2
S$124: E$622.D E$626.2
S$125: E$622.E E$627.2
S$126: E$622.F E$628.2
S$127: E$622.G E$629.2
S$128: E$622.H E$630.2
S$129: E$631.A E$632.2
S$130: E$631.B E$633.2
S$131: E$631.C E$634.2
S$132: E$631.D E$635.2
S$133: E$631.E E$636.2
S$134: E$631.F E$637.2
S$135: E$631.G E$638.2
S$136: E$631.H E$639.2
S$137: E$640.A E$641.2
S$138: E$640.B E$642.2
S$139: E$640.C E$643.2
S$140: E$640.D E$644.2
S$141: E$640.E E$645.2
S$142: E$640.F E$646.2
S$143: E$640.G E$647.2
S$144: E$640.H E$648.2
S$145: E$649.A E$650.2
S$146: E$649.B E$651.2
S$147: E$649.C E$652.2
S$148: E$649.D E$653.2
S$149: E$649.E E$654.2
S$150: E$649.F E$655.2
S$151: E$649.G E$656.2
S$152: E$649.H E$657.2
S$155: E$577.H' E$586.SER
S$156: E$586.H' E$595.SER
S$157: E$595.H' E$604.SER
S$158: E$604.H' E$613.SER
S$159: E$613.H' E$622.SER
S$160: E$622.H' E$631.SER
S$161: E$631.H' E$640.SER
S$162: E$640.H' E$649.SER
VCC: E$577.!SRCLR E$577.VCC E$586.!SRCLR E$586.VCC E$595.!SRCLR E$595.VCC E$604.!SRCLR E$604.VCC E$613.!SRCLR E$613.VCC E$622.!SRCLR E$622.VCC E$631.!SRCLR E$631.VCC E$640.!SRCLR E$640.VCC E$649.!SRCLR E$649.VCC E$658.4

## Tracks (layer width: path | path; a pad name or v marks a point on that pad's centre or on a via)
595-11
  Bottom 0.406: 123.19,100.96 122.56,101.6 52.7,101.6 52.07,100.96 E$577.SRCLK | 123.19,100.96 E$586.SRCLK | 123.19,100.96 123.83,101.6 193.68,101.6 194.31,100.96 | 194.31,100.96 E$595.SRCLK | 194.31,100.96 194.95,101.6 264.8,101.6 265.43,100.96 | 265.43,100.96 E$604.SRCLK | 265.43,100.96 266.06,101.6 335.91,101.6 336.55,100.96 | 336.55,100.96 E$613.SRCLK | 336.55,100.96 337.19,101.6 407.03,101.6 407.67,100.96 | 407.67,100.96 E$622.SRCLK | 407.67,100.96 408.31,101.6 478.15,101.6 478.79,100.96 | 478.79,100.96 E$631.SRCLK | 478.79,100.96 479.42,101.6 549.27,101.6 549.91,100.96 | 549.91,100.96 E$640.SRCLK | 549.91,100.96 550.54,101.6 620.39,101.6 621.03,100.96 | 621.03,100.96 E$649.SRCLK | 621.03,100.96 621.66,101.6 627.38,101.6 628.01,100.96 628.01,92.08 628.65,91.44 644.52,91.44 648.34,87.63 648.34,55.88 648.97,55.25 659.13,55.25 659.76,54.61 659.76,43.18 659.13,42.55 E$658.8
595-12  (via drill 1 pad 1.15)
  Top 0.406: v120.65,103.02 v120.65,100.18 | v191.77,103.02 v191.77,100.18 | v262.89,103.02 v262.89,100.18 | v334.01,103.02 v334.01,100.18 334.01,99.69 | v405.13,103.02 v405.13,100.18 | v476.25,103.02 v476.25,100.18 | v547.37,103.02 v547.37,100.18 | v618.49,103.02 v618.49,100.18 618.49,99.69
  Bottom 0.406: v120.65,100.18 E$586.RCLK | E$577.RCLK 49.53,102.23 50.17,102.87 120.65,102.87 v120.65,103.02 191.62,103.02 191.77,102.87 v191.77,103.02 262.74,103.02 262.89,102.87 v262.89,103.02 333.86,103.02 334.01,102.87 v334.01,103.02 404.98,103.02 405.13,102.87 v405.13,103.02 476.1,103.02 476.25,102.87 v476.25,103.02 547.22,103.02 547.37,102.87 v547.37,103.02 618.34,103.02 618.49,102.87 v618.49,103.02 628.5,103.02 629.28,102.23 629.28,93.34 629.92,92.71 645.79,92.71 649.61,88.9 649.61,57.15 650.24,56.52 660.4,56.52 661.03,55.88 661.03,40.64 660.4,40.01 E$658.10 | v191.77,100.18 E$595.RCLK | v262.89,100.18 E$604.RCLK | v334.01,100.18 E$613.RCLK | v405.13,100.18 E$622.RCLK | v476.25,100.18 E$631.RCLK | v547.37,100.18 E$640.RCLK | v618.49,100.18 E$649.RCLK
595-(14)-SERIALPIN
  Bottom 0.406: E$577.SER 44.45,99.06 43.82,99.69 41.28,99.69 40.64,99.06 40.64,95.25 40.01,94.61 38.73,94.61 38.1,95.25 38.1,101.6 38.73,102.23 46.36,102.23 46.99,102.87 46.99,106.05 47.62,106.68 631.19,106.68 631.82,106.05 631.82,95.88 632.46,95.25 647.06,95.25 652.14,90.17 652.14,59.69 652.78,59.05 662.94,59.05 663.57,58.42 663.57,38.1 662.94,37.47 E$658.12
GND
  Bottom 0.406: E$649.!OE 615.95,94.61 616.59,93.98 621.66,93.98 622.3,94.61 622.3,99.06 622.93,99.69 624.2,99.69 624.84,99.06 624.84,90.8 E$649.GND 643.89,89.53 646.43,86.99 646.43,79.38 | E$640.!OE 544.83,95.25 545.47,94.61 550.54,94.61 551.18,95.25 551.18,99.06 551.81,99.69 553.09,99.69 553.72,99.06 553.72,90.8 E$640.GND 572.13,89.53 574.67,86.99 574.67,79.38 | E$631.!OE 473.71,95.25 474.34,94.61 479.42,94.61 480.06,95.25 480.06,99.06 480.69,99.69 481.96,99.69 482.6,99.06 482.6,90.8 E$631.GND 500.38,89.53 504.19,85.72 504.19,79.38 | E$622.!OE 402.59,95.25 403.22,94.61 408.31,94.61 408.94,95.25 408.94,99.06 409.57,99.69 410.84,99.69 411.48,99.06 411.48,90.8 E$622.GND 414.65,87.63 422.27,87.63 424.18,85.72 432.44,85.72 433.07,85.09 433.07,79.38 | E$613.!OE 331.47,95.25 332.1,94.61 337.19,94.61 337.82,95.25 337.82,99.06 338.45,99.69 339.72,99.69 340.36,99.06 340.36,90.8 E$613.GND 344.17,86.99 351.79,86.99 353.06,85.72 361.31,85.72 361.95,85.09 361.95,79.38 | E$604.!OE 260.35,95.25 260.99,94.61 266.06,94.61 266.7,95.25 266.7,99.06 267.33,99.69 268.61,99.69 269.24,99.06 269.24,90.8 E$604.GND 278.13,89.53 281.31,86.36 290.19,86.36 290.83,85.72 290.83,79.38 | E$595.!OE 189.23,95.25 189.87,94.61 194.95,94.61 195.58,95.25 195.58,99.06 196.22,99.69 197.49,99.69 198.12,99.06 198.12,90.8 E$595.GND 200.66,89.53 203.2,86.99 209.55,86.99 210.82,85.72 219.08,85.72 219.71,85.09 219.71,79.38 | E$586.!OE 118.11,95.25 118.75,94.61 123.83,94.61 124.46,95.25 124.46,99.06 125.09,99.69 126.37,99.69 127,99.06 127,90.8 E$586.GND 128.27,88.9 128.91,88.27 131.44,88.27 132.72,86.99 139.06,86.99 140.34,85.72 147.96,85.72 148.59,85.09 148.59,79.38
  Bottom 0.406: E$577.!OE 46.99,93.98 47.62,93.34 56.52,93.34 57.15,92.71 E$577.GND 58.42,89.53 60.33,87.63 66.68,87.63 68.58,85.72 76.84,85.72 77.47,85.09 77.47,79.38 78.11,78.74 147.96,78.74 148.59,79.38 | 148.59,79.38 149.22,78.74 219.08,78.74 219.71,79.38 | 219.71,79.38 220.34,78.74 290.19,78.74 290.83,79.38 | 290.83,79.38 291.46,78.74 361.31,78.74 361.95,79.38 | 361.95,79.38 362.58,78.74 432.44,78.74 433.07,79.38 | 433.07,79.38 433.7,78.74 503.56,78.74 504.19,79.38 | 504.19,79.38 504.82,78.74 574.04,78.74 574.67,79.38 | 574.67,79.38 575.31,78.74 645.79,78.74 646.43,79.38 | 646.43,79.38 647.06,78.74 647.06,54.61 647.7,53.98 654.05,53.98 654.68,53.34 E$658.2
ROW1
  Bottom 0.61: E$1.A E$9.A E$17.A E$25.A E$33.A E$41.A E$49.A E$57.A E$65.A E$73.A E$81.A E$89.A E$97.A E$105.A E$113.A E$121.A E$129.A E$137.A E$145.A E$153.A E$161.A E$169.A E$177.A E$185.A E$193.A E$201.A E$209.A E$217.A E$225.A E$233.A E$241.A E$249.A E$257.A E$265.A E$273.A E$281.A E$289.A E$297.A E$305.A E$313.A E$321.A E$329.A E$337.A E$345.A E$353.A E$361.A E$369.A E$377.A E$385.A E$393.A E$401.A E$409.A E$417.A E$425.A E$433.A E$441.A E$449.A E$457.A E$465.A E$473.A E$481.A E$489.A E$497.A E$505.A E$513.A E$521.A E$529.A E$537.A E$545.A E$553.A E$561.A E$569.A 644.52,67.31 645.79,66.04 645.79,52.71 648.34,50.17 E$658.1
ROW2
  Bottom 0.61: E$2.A E$10.A E$18.A E$26.A E$34.A E$42.A E$50.A E$58.A E$66.A E$74.A E$82.A E$90.A E$98.A E$106.A E$114.A E$122.A E$130.A E$138.A E$146.A E$154.A E$162.A E$170.A E$178.A E$186.A E$194.A E$202.A E$210.A E$218.A E$226.A E$234.A E$242.A E$250.A E$258.A E$266.A E$274.A E$282.A E$290.A E$298.A E$306.A E$314.A E$322.A E$330.A E$338.A E$346.A E$354.A E$362.A E$370.A E$378.A E$386.A E$394.A E$402.A E$410.A E$418.A E$426.A E$434.A E$442.A E$450.A E$458.A E$466.A E$474.A E$482.A E$490.A E$498.A E$506.A E$514.A E$522.A E$530.A E$538.A E$546.A E$554.A E$562.A E$570.A 643.89,59.05 644.52,58.42 644.52,52.07 645.79,50.8 645.79,48.26 646.43,47.62 E$658.3
ROW3
  Bottom 0.61: E$3.A E$11.A E$19.A E$27.A E$35.A E$43.A E$51.A E$59.A E$67.A E$75.A E$83.A E$91.A E$99.A E$107.A E$115.A E$123.A E$131.A E$139.A E$147.A E$155.A E$163.A E$171.A E$179.A E$187.A E$195.A E$203.A E$211.A E$219.A E$227.A E$235.A E$243.A E$251.A E$259.A E$267.A E$275.A E$283.A E$291.A E$299.A E$307.A E$315.A E$323.A E$331.A E$339.A E$347.A E$355.A E$363.A E$371.A E$379.A E$387.A E$395.A E$403.A E$411.A E$419.A E$427.A E$435.A E$443.A E$451.A E$459.A E$467.A E$475.A E$483.A E$491.A E$499.A E$507.A E$515.A E$523.A E$531.A E$539.A E$547.A E$555.A E$563.A E$571.A 643.89,50.8 644.52,50.17 644.52,45.72 645.16,45.09 E$658.5
ROW4
  Bottom 0.61: E$4.A E$12.A E$20.A E$28.A E$36.A E$44.A E$52.A E$60.A E$68.A E$76.A E$84.A E$92.A E$100.A E$108.A E$116.A E$124.A E$132.A E$140.A E$148.A E$156.A E$164.A E$172.A E$180.A E$188.A E$196.A E$204.A E$212.A E$220.A E$228.A E$236.A E$244.A E$252.A E$260.A E$268.A E$276.A E$284.A E$292.A E$300.A E$308.A E$316.A E$324.A E$332.A E$340.A E$348.A E$356.A E$364.A E$372.A E$380.A E$388.A E$396.A E$404.A E$412.A E$420.A E$428.A E$436.A E$444.A E$452.A E$460.A E$468.A E$476.A E$484.A E$492.A E$500.A E$508.A E$516.A E$524.A E$532.A E$540.A E$548.A E$556.A E$564.A E$572.A E$658.7
ROW5
  Bottom 0.61: E$5.A E$13.A E$21.A E$29.A E$37.A E$45.A E$53.A E$61.A E$69.A E$77.A E$85.A E$93.A E$101.A E$109.A E$117.A E$125.A E$133.A E$141.A E$149.A E$157.A E$165.A E$173.A E$181.A E$189.A E$197.A E$205.A E$213.A E$221.A E$229.A E$237.A E$245.A E$253.A E$261.A E$269.A E$277.A E$285.A E$293.A E$301.A E$309.A E$317.A E$325.A E$333.A E$341.A E$349.A E$357.A E$365.A E$373.A E$381.A E$389.A E$397.A E$405.A E$413.A E$421.A E$429.A E$437.A E$445.A E$453.A E$461.A E$469.A E$477.A E$485.A E$493.A E$501.A E$509.A E$517.A E$525.A E$533.A E$541.A E$549.A E$557.A E$565.A E$573.A 643.89,34.29 644.52,34.93 644.52,39.37 645.16,40.01 E$658.9
ROW6
  Bottom 0.61: E$6.A E$14.A E$22.A E$30.A E$38.A E$46.A E$54.A E$62.A E$70.A E$78.A E$86.A E$94.A E$102.A E$110.A E$118.A E$126.A E$134.A E$142.A E$150.A E$158.A E$166.A E$174.A E$182.A E$190.A E$198.A E$206.A E$214.A E$222.A E$230.A E$238.A E$246.A E$254.A E$262.A E$270.A E$278.A E$286.A E$294.A E$302.A E$310.A E$318.A E$326.A E$334.A E$342.A E$350.A E$358.A E$366.A E$374.A E$382.A E$390.A E$398.A E$406.A E$414.A E$422.A E$430.A E$438.A E$446.A E$454.A E$462.A E$470.A E$478.A E$486.A E$494.A E$502.A E$510.A E$518.A E$526.A E$534.A E$542.A E$550.A E$558.A E$566.A E$574.A 643.89,26.04 644.52,26.67 644.52,33.02 645.79,34.29 645.79,36.83 646.43,37.47 E$658.11
ROW7
  Bottom 0.61: E$7.A E$15.A E$23.A E$31.A E$39.A E$47.A E$55.A E$63.A E$71.A E$79.A E$87.A E$95.A E$103.A E$111.A E$119.A E$127.A E$135.A E$143.A E$151.A E$159.A E$167.A E$175.A E$183.A E$191.A E$199.A E$207.A E$215.A E$223.A E$231.A E$239.A E$247.A E$255.A E$263.A E$271.A E$279.A E$287.A E$295.A E$303.A E$311.A E$319.A E$327.A E$335.A E$343.A E$351.A E$359.A E$367.A E$375.A E$383.A E$391.A E$399.A E$407.A E$415.A E$423.A E$431.A E$439.A E$447.A E$455.A E$463.A E$471.A E$479.A E$487.A E$495.A E$503.A E$511.A E$519.A E$527.A E$535.A E$543.A E$551.A E$559.A E$567.A E$575.A 643.89,17.78 644.52,18.41 644.52,24.77 645.79,26.04 645.79,32.38 648.34,34.93 E$658.13
ROW8
  Bottom 0.61: E$8.A E$16.A E$24.A E$32.A E$40.A E$48.A E$56.A E$64.A E$72.A E$80.A E$88.A E$96.A E$104.A E$112.A E$120.A E$128.A E$136.A E$144.A E$152.A E$160.A E$168.A E$176.A E$184.A E$192.A E$200.A E$208.A E$216.A E$224.A E$232.A E$240.A E$248.A E$256.A E$264.A E$272.A E$280.A E$288.A E$296.A E$304.A E$312.A E$320.A E$328.A E$336.A E$344.A E$352.A E$360.A E$368.A E$376.A E$384.A E$392.A E$400.A E$408.A E$416.A E$424.A E$432.A E$440.A E$448.A E$456.A E$464.A E$472.A E$480.A E$488.A E$496.A E$504.A E$512.A E$520.A E$528.A E$536.A E$544.A E$552.A E$560.A E$568.A E$576.A 643.89,9.53 644.52,10.16 644.52,16.51 645.79,17.78 645.79,24.13 647.06,25.4 647.06,31.75 648.34,33.02 654.05,33.02 654.68,33.66 E$658.14
S$1  (via drill 1 pad 1.15)
  Top 0.61: v15.88,15.88 v15.88,19.68 | v15.88,24.13 v15.88,27.94 | v15.88,32.38 v15.88,36.2 | v15.88,40.64 v15.88,44.45 | v15.88,48.9 v15.88,52.71 | v15.88,57.15 v15.88,60.96 | v15.88,65.41 v15.88,69.21
  Bottom 0.61: E$16.K 17.15,12.06 15.88,13.33 v15.88,15.88 | v15.88,19.68 16.51,20.32 17.15,20.32 | E$15.K 17.15,20.32 | 17.15,20.32 15.88,21.59 v15.88,24.13 | 16.51,28.57 E$14.K | v15.88,27.94 16.51,28.57 | 16.51,28.57 15.88,29.21 v15.88,32.38 | 16.51,36.83 E$13.K | v15.88,36.2 16.51,36.83 | 16.51,36.83 15.88,37.47 v15.88,40.64 | v15.88,44.45 16.51,45.09 | 16.51,45.09 E$12.K | 16.51,45.09 15.88,45.72 v15.88,48.9 | v15.88,52.71 16.51,53.34 | 16.51,53.34 E$11.K | 16.51,53.34 15.88,53.98 v15.88,57.15 | v15.88,60.96 16.51,61.6 | 16.51,61.6 E$10.K | 16.51,61.6 15.88,62.23 v15.88,65.41 | v15.88,69.21 16.51,69.85 E$9.K E$579.1
S$3  (via drill 1 pad 1.3)
  other vias: 668.02,109.22
S$6  (via drill 1 pad 1.3)
  other vias: 668.02,3.81
S$7  (via drill 1 pad 1.3)
  other vias: 233.68,110.49
S$8  (via drill 1 pad 1.3)
  other vias: 436.88,110.49
S$9  (via drill 1 pad 1.3)
  other vias: 3.81,3.81
S$10  (via drill 1 pad 1.15)